# Altium PCB Slave_LHS.PcbDoc (part 3 of 3)
Units mil, origin at the board's own origin, x right, y up, seen from the top; angles counter-clockwise.
Board outline 6000 x 7620.08 mil, 4 copper layers (Top Layer, Int1 (GND), Int2 (PWR), Bottom Layer), stack 53.912 mil thick; 248 components, 191 nets, 688 pads, 143 vias.
Unrouted connection lines stored in the file: 218.
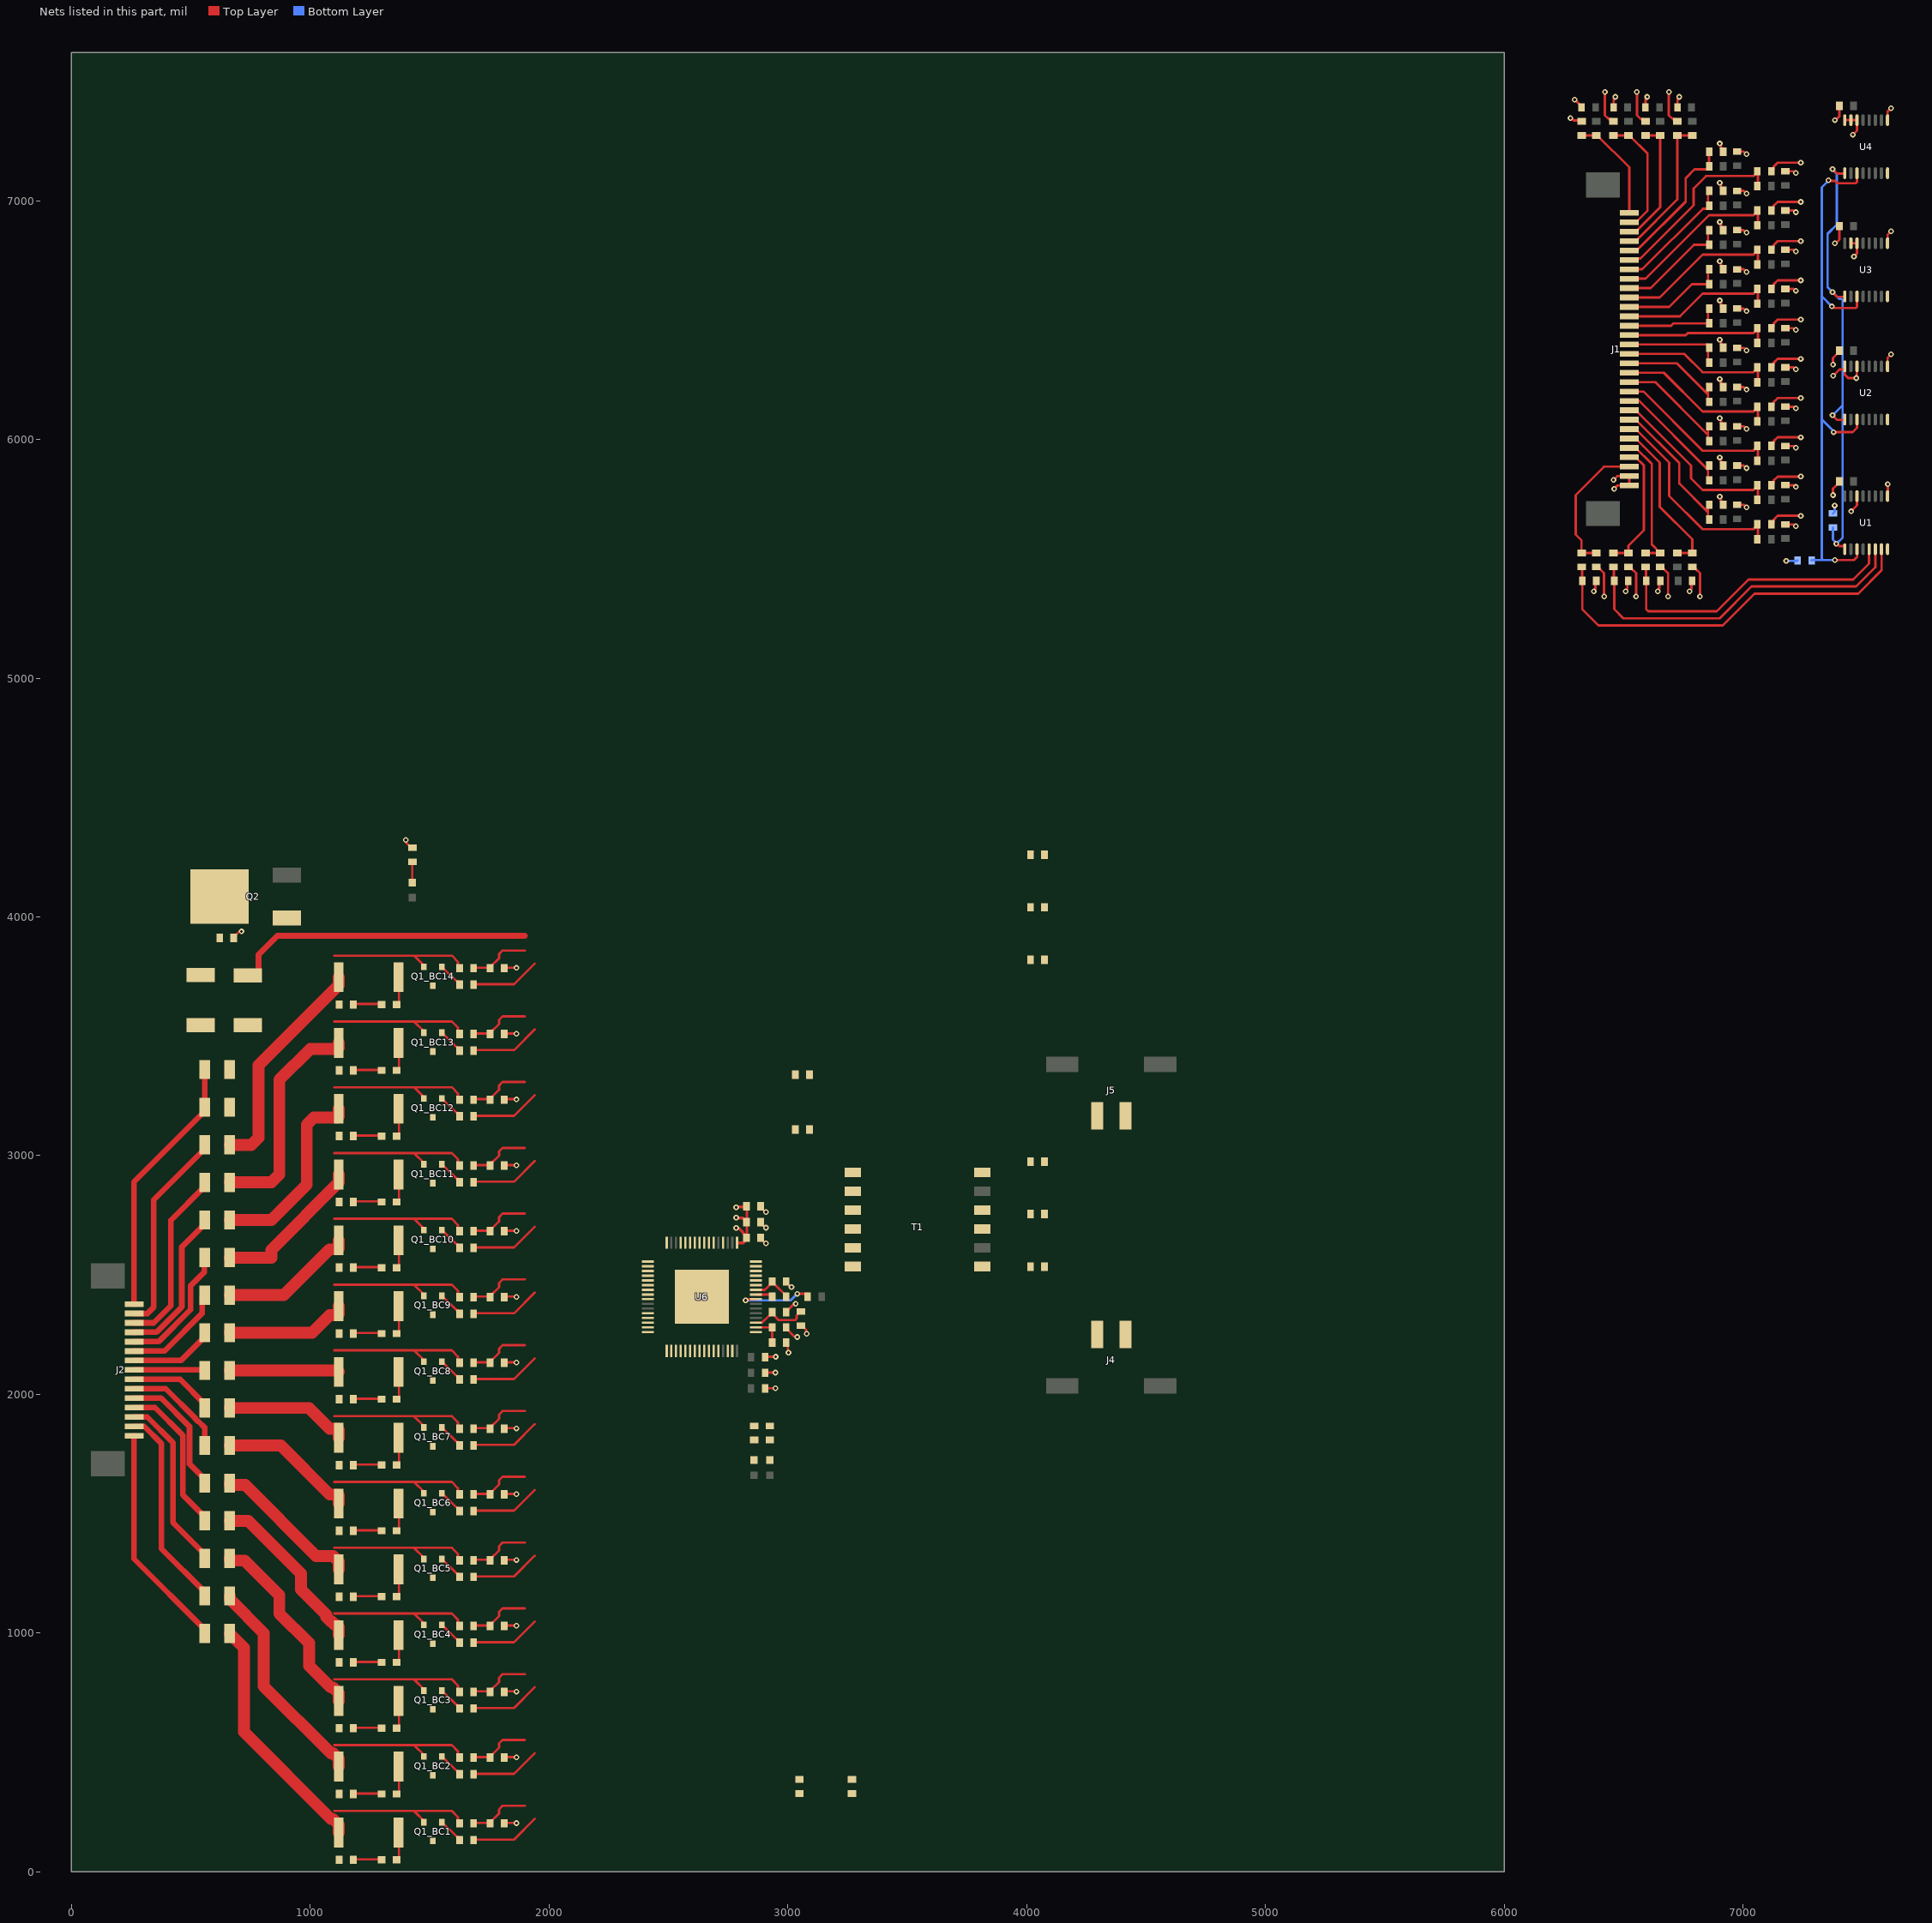
[diagram p2: the nets of this part, all layers, seen from the top]

## Via types
v1: diameter 23.62, hole 11.81, Top Layer to Bottom Layer, 143 vias

## Nets (pads, with @x,y where several pads share a name; then routed paths per layer and width w, separated by ;. In a path a pad name is that pad's centre, name@x,y a point inside that pad or via, vN(x,y) a via of type N, cw(c..) or ccw(c..) an arc to the next point about the centre after c; other vN are vias at no path point) (continued)
ADCIN26: C22_AFE26.2 R22_AFE26.2 U1.5 | length 1262.4
  Top Layer w10: C22_AFE26.2@6591.04,5407.48 C22_AFE26.2@6593.26,5405.26 ; C22_AFE26.2@6593.5,5407.48 R22_AFE26.2@6593.5,5465.55 ; C22_AFE26.2@6594.49,5407.48 6594.49,5289.37 6603.5,5280.35 6890.25,5280.35 7023.44,5413.54 7461.77,5413.54 7527.56,5479.33 7527.56,5518.98 7527.82,5519.24 U1.5@7527.82,5543.08
ADCIN27: C22_AFE27.2 R22_AFE27.2 U1.6 | length 1447.2
  Top Layer w10: C22_AFE27.2@6457.19,5407.48 C22_AFE27.2@6459.4,5405.26 ; C22_AFE27.2@6459.65,5407.48 R22_AFE27.2@6459.65,5465.55 ; C22_AFE27.2@6460.63,5407.48 6460.63,5289.37 6499.33,5250.67 6902.54,5250.67 7035.73,5383.86 7473.43,5383.86 7554.13,5464.57 U1.6@7554.13,5534.28
ADCIN28: C22_AFE28.2 R22_AFE28.2 U1.7 | length 1638.6
  Top Layer w10: C22_AFE28.2@6323.33,5407.48 C22_AFE28.2@6325.54,5405.26 ; C22_AFE28.2@6325.79,5407.48 R22_AFE28.2@6325.79,5465.55 ; C22_AFE28.2@6326.77,5407.48 6326.77,5289.37 6395.16,5220.98 6914.84,5220.98 7048.03,5354.17 7482.13,5354.17 7580.71,5452.76 7580.71,5518.98 7580.45,5519.24 7580.45,5533.31 U1.7@7580.71,5533.57
C0: C17.2 R16.2 U6.38
C1: C5_BC1.2 R3_BC1.2 U6.36 | length 255
  Top Layer w10: R3_BC1.2@1686.02,204.72 1754.92,204.72 1754.92,208.66 1790.35,244.09 1790.35,261.81 1805.12,276.57 1898.62,276.57
C2: C5_BC2.2 R3_BC2.2 U6.34 | length 255
  Top Layer w10: R3_BC2.2@1686.02,480.32 1754.92,480.32 1754.92,484.25 1790.35,519.69 1790.35,537.4 1805.12,552.17 1898.62,552.17
C3: C5_BC3.2 R3_BC3.2 U6.32 | length 255
  Top Layer w10: R3_BC3.2@1686.02,755.91 1754.92,755.91 1754.92,759.84 1790.35,795.28 1790.35,812.99 1805.12,827.76 1898.62,827.76
C4: C5_BC4.2 R3_BC4.2 U6.30 | length 255
  Top Layer w10: R3_BC4.2@1686.02,1031.5 1754.92,1031.5 1754.92,1035.43 1790.35,1070.87 1790.35,1088.58 1805.12,1103.35 1898.62,1103.35
C5: C5_BC5.2 R3_BC5.2 U6.28 | length 255
  Top Layer w10: R3_BC5.2@1686.02,1307.09 1754.92,1307.09 1754.92,1311.02 1790.35,1346.46 1790.35,1364.17 1805.12,1378.94 1898.62,1378.94
C6: C5_BC6.2 R3_BC6.2 U6.24 | length 255
  Top Layer w10: R3_BC6.2@1686.02,1582.68 1754.92,1582.68 1754.92,1586.61 1790.35,1622.05 1790.35,1639.76 1805.12,1654.53 1898.62,1654.53
C7: C5_BC7.2 R3_BC7.2 U6.22 | length 255
  Top Layer w10: R3_BC7.2@1686.02,1858.27 1754.92,1858.27 1754.92,1862.2 1790.35,1897.64 1790.35,1915.35 1805.12,1930.12 1898.62,1930.12
C8: C5_BC8.2 R3_BC8.2 U6.20 | length 255
  Top Layer w10: R3_BC8.2@1686.02,2133.86 1754.92,2133.86 1754.92,2137.8 1790.35,2173.23 1790.35,2190.95 1805.12,2205.71 1898.62,2205.71
C9: C5_BC9.2 R3_BC9.2 U6.18 | length 255
  Top Layer w10: R3_BC9.2@1686.02,2409.45 1754.92,2409.45 1754.92,2413.39 1790.35,2448.82 1790.35,2466.54 1805.12,2481.3 1898.62,2481.3
C10: C5_BC10.2 R3_BC10.2 U6.16 | length 255
  Top Layer w10: R3_BC10.2@1686.02,2685.04 1754.92,2685.04 1754.92,2688.98 1790.35,2724.41 1790.35,2742.13 1805.12,2756.89 1898.62,2756.89
C11: C5_BC11.2 R3_BC11.2 U6.12 | length 255
  Top Layer w10: R3_BC11.2@1686.02,2960.63 1754.92,2960.63 1754.92,2964.57 1790.35,3000 1790.35,3017.72 1805.12,3032.48 1898.62,3032.48
C12: C5_BC12.2 R3_BC12.2 U6.10 | length 255
  Top Layer w10: R3_BC12.2@1686.02,3236.22 1754.92,3236.22 1754.92,3240.16 1790.35,3275.59 1790.35,3293.31 1805.12,3308.07 1898.62,3308.07
C13: C5_BC13.2 R3_BC13.2 U6.8 | length 255
  Top Layer w10: R3_BC13.2@1686.02,3511.81 1754.92,3511.81 1754.92,3515.75 1790.35,3551.18 1790.35,3568.9 1805.12,3583.66 1898.62,3583.66
C14: C5_BC14.2 R3_BC14.2 U6.4 U6.6 | length 255
  Top Layer w10: R3_BC14.2@1686.02,3787.4 1754.92,3787.4 1754.92,3791.34 1790.35,3826.77 1790.35,3844.49 1805.12,3859.25 1898.62,3859.25
CB1: C1.1 C2.1 C3.1 C4.1 C5_BC1.1 C5_BC2.1 C5_BC3.1 C5_BC4.1 C5_BC5.1 C5_BC6.1 C5_BC7.1 C5_BC8.1 C5_BC9.1 C5_BC10.1 C5_BC11.1 C5_BC12.1 C5_BC13.1 C5_BC14.1 C6.1 C7.1 C8.1 C9.1 C10.1 C11.1 C12.1 C13.1 C14.1 C15.1 C16.1 C17.1 C18.1 C19.1 C20.2 C21.1 C22_AFE1.1 C22_AFE2.1 C22_AFE3.1 C22_AFE4.1 C22_AFE5.1 C22_AFE6.1 C22_AFE7.1 C22_AFE8.1 C22_AFE9.1 C22_AFE10.1 C22_AFE11.1 C22_AFE12.1 C22_AFE13.1 C22_AFE14.1 C22_AFE15.1 C22_AFE16.1 C22_AFE17.1 C22_AFE18.1 C22_AFE19.1 C22_AFE20.1 C22_AFE21.1 C22_AFE22.1 C22_AFE23.1 C22_AFE24.1 C22_AFE25.1 C22_AFE26.1 C22_AFE27.1 C22_AFE28.1 F3.2 J1.29 J1.30 R5_BC1.2 R6_BC1.1 R7.1 R12.1 R16.1 U1.9 U1.14 U2.9 U2.14 U2.16 U3.9 U3.14 U3.15 U4.9 U4.14 U4.15 U4.16 U6.59 U6.60 U6.65 | length 4675.5
  Top Layer w10: C16.1@679.13,3911.42 679.13,3915.35 702.76,3938.98 v1(711.61,3938.98) ; v1(1399.61,4321.85) 1399.61,4312.99 1423.23,4289.37 R12.1@1427.17,4289.37 ; C5_BC1.1@1813.98,204.72 1862.2,204.72 v1(1863.19,203.74) ; C5_BC2.1@1813.98,480.32 1862.2,480.32 v1(1863.19,479.33) ; C5_BC3.1@1813.98,755.91 1862.2,755.91 v1(1863.19,754.92) ; C5_BC4.1@1813.98,1031.5 1862.2,1031.5 v1(1863.19,1030.51) ; C5_BC5.1@1813.98,1307.09 1862.2,1307.09 v1(1863.19,1306.1) ; C5_BC6.1@1813.98,1582.68 1862.2,1582.68 v1(1863.19,1581.69) ; C5_BC7.1@1813.98,1858.27 1862.2,1858.27 v1(1863.19,1857.28) ; C5_BC8.1@1813.98,2133.86 1862.2,2133.86 v1(1863.19,2132.87) ; C5_BC9.1@1813.98,2409.45 1862.2,2409.45 v1(1863.19,2408.46) ; C5_BC10.1@1813.98,2685.04 1862.2,2685.04 v1(1863.19,2684.06) ; C5_BC11.1@1813.98,2960.63 1862.2,2960.63 v1(1863.19,2959.65) ; C5_BC12.1@1813.98,3236.22 1862.2,3236.22 v1(1863.19,3235.24) ; C5_BC13.1@1813.98,3511.81 1862.2,3511.81 v1(1863.19,3510.83) ; C5_BC14.1@1813.98,3787.4 1862.2,3787.4 v1(1863.19,3786.42) ; C8.1@2893.7,2644.69 2893.7,2643.78 2905.38,2632.1 v1(2907.82,2632.1) ; C6.1@2893.7,2710.59 2893.7,2709.69 2905.38,2698 v1(2907.82,2698) ; C7.1@2893.7,2776.5 2893.7,2775.59 2905.38,2763.91 v1(2907.82,2763.91) ; C13.1@2903.5,2023.74 2905.39,2025.63 v1(2947.87,2025.63) ; C14.1@2903.5,2089.19 2905.39,2091.08 v1(2947.87,2091.08) ; C15.1@2904.45,2155.59 2906.34,2157.48 v1(2948.82,2157.48) ; C11.1@2993.11,2279.53 2993.11,2275.59 3025.94,2242.76 3036.76,2242.76 v1(3039.37,2240.16) ; C9.1@2993.11,2346.46 3025.94,2379.28 v1(3032.83,2379.28) ; C12.1@2998.11,2210.71 3000.03,2208.79 3000.03,2177.14 v1(3002.63,2174.53) ; R7.1@3000.98,2461.54 3000.98,2460.63 3012.67,2448.95 v1(3015.1,2448.95) ; C10.1@3055.12,2287.4 3059.06,2287.4 3076.13,2270.32 3076.13,2256.42 v1(3078.74,2253.81) ; v1(6295.28,7423.23) 6323.82,7394.68 C22_AFE1.1@6323.82,7390.75 ; v1(6375,5363.19) 6375,5366.88 6382.14,5374.01 6382.14,5407.24 C22_AFE28.1@6382.38,5407.48 ; v1(6457.68,5830.71) 6473.43,5846.46 J1.29@6523.62,5846.46 J1.30@6523.62,5807.09 6474.41,5807.09 v1(6460.63,5793.31) ; C22_AFE2.1@6457.68,7390.75 6457.92,7390.99 6457.92,7424.22 6465.06,7431.35 v1(6465.06,7435.04) ; v1(6508.86,5363.19) 6508.86,5366.88 6516,5374.01 6516,5407.24 C22_AFE27.1@6516.24,5407.48 ; C22_AFE3.1@6591.54,7390.75 6591.78,7390.99 6591.78,7424.22 6598.92,7431.35 v1(6598.92,7435.04) ; v1(6642.72,5363.19) 6642.72,5366.88 6649.85,5374.01 6649.85,5407.24 C22_AFE26.1@6650.1,5407.48 ; C22_AFE4.1@6725.39,7390.75 6725.64,7390.99 6725.64,7424.22 6732.78,7431.35 v1(6732.78,7435.04) ; v1(6776.57,5363.19) 6776.57,5366.88 6783.71,5374.01 6783.71,5407.24 C22_AFE25.1@6783.96,5407.48 ; C22_AFE23.1@6975.39,5726.38 7002.61,5726.38 7013.44,5715.55 v1(7014.76,5715.55) ; C22_AFE21.1@6975.39,5890.75 7002.61,5890.75 7013.44,5879.92 v1(7014.76,5879.92) ; C22_AFE19.1@6975.39,6055.12 7002.61,6055.12 7013.44,6044.29 v1(7014.76,6044.29) ; C22_AFE17.1@6975.39,6219.49 7002.61,6219.49 7013.44,6208.66 v1(7014.76,6208.66) ; C22_AFE15.1@6975.39,6383.86 7002.61,6383.86 7013.44,6373.03 v1(7014.76,6373.03) ; C22_AFE13.1@6975.39,6548.23 7002.61,6548.23 7013.44,6537.4 v1(7014.76,6537.4) ; C22_AFE11.1@6975.39,6712.6 7002.61,6712.6 7013.44,6701.77 v1(7014.76,6701.77) ; C22_AFE9.1@6975.39,6876.97 7002.61,6876.97 7013.44,6866.14 v1(7014.76,6866.14) ; C22_AFE7.1@6975.39,7041.34 7002.61,7041.34 7013.44,7030.51 v1(7014.76,7030.51) ; C22_AFE5.1@6975.39,7205.71 7002.61,7205.71 7013.44,7194.88 v1(7014.76,7194.88) ; C22_AFE24.1@7177.17,5644.19 7177.41,5643.95 7210.63,5643.95 7217.77,5636.81 v1(7221.46,5636.81) ; C22_AFE22.1@7177.17,5808.56 7177.41,5808.32 7210.63,5808.32 7217.77,5801.18 v1(7221.46,5801.18) ; C22_AFE20.1@7177.17,5972.93 7177.41,5972.69 7210.63,5972.69 7217.77,5965.55 v1(7221.46,5965.55) ; C22_AFE18.1@7177.17,6137.3 7177.41,6137.06 7210.63,6137.06 7217.77,6129.92 v1(7221.46,6129.92) ; C22_AFE16.1@7177.17,6301.67 7177.41,6301.43 7210.63,6301.43 7217.77,6294.29 v1(7221.46,6294.29) ; C22_AFE14.1@7177.17,6466.04 7177.41,6465.8 7210.63,6465.8 7217.77,6458.66 v1(7221.46,6458.66) ; C22_AFE12.1@7177.17,6630.41 7177.41,6630.17 7210.63,6630.17 7217.77,6623.03 v1(7221.46,6623.03) ; C22_AFE10.1@7177.17,6794.78 7177.41,6794.54 7210.63,6794.54 7217.77,6787.4 v1(7221.46,6787.4) ; C22_AFE8.1@7177.17,6959.15 7177.41,6958.91 7210.63,6958.91 7217.77,6951.77 v1(7221.46,6951.77) ; C22_AFE6.1@7177.17,7123.52 7177.41,7123.28 7210.63,7123.28 7217.77,7116.14 v1(7221.46,7116.14) ; v1(7376.97,5766.73) 7376.97,5794.29 7403.54,5820.87 C1.1@7403.54,5824.8 ; v1(7376.97,6313.98) 7376.97,6341.54 7403.54,6368.11 C2.1@7403.54,6372.05 ; v1(7377.95,6266.73) 7404.11,6292.89 7424.44,6292.89 U2.16@7426.18,6294.64 ; v1@7392.72,6826.77 7403.54,6837.6 C3.1@7403.54,6893.7 ; v1@7392.72,7342.52 7403.54,7353.35 C4.1@7403.54,7397.64 ; U2.16@7426.18,6306.1 U2.16@7426.18,6294.64 ; U4.16@7426.18,7337.6 U4.15@7451.77,7337.6 U4.14@7477.36,7337.6 7477.36,7293.31 v1(7460.63,7276.57) ; U3.15@7451.05,6822.57 U3.15@7451.77,6821.85 U3.14@7477.36,6821.85 7477.36,6778.54 v1(7464.57,6765.75) ; v1(7452.76,5698.82) 7477.36,5723.43 U1.14@7477.36,5762.8 U1.14@7477.36,5773.23 ; U2.14@7477.36,6306.1 7476.64,6305.38 7476.64,6259.12 v1(7474.41,6256.89) 7440.28,6256.89 7426.18,6270.98 U2.16@7426.18,6294.64 ; U2.9@7605.32,6306.1 7605.32,6341.54 v1(7620.08,6356.3) ; U3.9@7605.32,6821.85 7605.32,6857.28 v1(7620.08,6872.05) ; U4.9@7605.32,7337.6 7605.32,7373.03 v1(7620.08,7387.8) ; U1.9@7606.3,5767.18 7606.04,5767.44 7606.04,5783.91 7606.3,5784.17 v1(7606.3,5812.99)
  Top Layer w50: F3.2@662.2,998.03 721.78,938.46 721.78,585.46 1086.31,220.92 1095.54,220.92 1119.09,197.36 R5_BC1.2@1119.09,164.68
  other v1: 7384.84,6821.85 7384.84,7337.6
CB2: F1_BC1.2 Q1_BC1.2 R3_BC1.1 R5_BC2.2 R6_BC2.1 | length 1529.7
  Top Layer w10: 1100.39,254.92 1434.06,254.92 ; Q1_BC1.2@1477.36,209.65 1477.36,211.61 1434.06,254.92 ; R3_BC1.1@1626.97,204.72 1618.49,213.2 1618.49,228.95 1592.52,254.92 1434.06,254.92
  Top Layer w50: F1_BC1.2@662.2,1155.51 662.2,1143.11 805.31,1000 805.31,777.51 1086.31,496.51 1095.54,496.51 1119.09,472.95 R5_BC2.2@1119.09,440.28
CB3: F1_BC2.2 Q1_BC2.2 R3_BC2.1 R5_BC3.2 R6_BC3.1 | length 1446.8
  Top Layer w10: 1100.39,530.51 1434.06,530.51 ; Q1_BC2.2@1477.36,485.24 1477.36,487.2 1434.06,530.51 ; R3_BC2.1@1626.97,480.32 1618.49,488.8 1618.49,504.54 1592.52,530.51 1434.06,530.51
  Top Layer w50: F1_BC2.2@662.2,1312.99 662.2,1306.18 664.76,1303.62 724.92,1303.62 870.08,1158.46 870.08,1082.68 995.08,957.68 995.08,863.33 1086.31,772.1 1095.54,772.1 1119.09,748.54 R5_BC3.2@1119.09,715.87
CB4: F1_BC3.2 Q1_BC3.2 R3_BC3.1 R5_BC4.2 R6_BC4.1 | length 1339.1
  Top Layer w10: 1100.39,806.1 1434.06,806.1 ; Q1_BC3.2@1477.36,760.83 1477.36,762.8 1434.06,806.1 ; R3_BC3.1@1626.97,755.91 1618.49,764.39 1618.49,780.13 1592.52,806.1 1434.06,806.1
  Top Layer w50: F1_BC3.2@662.2,1470.47 740.16,1470.47 961.46,1249.17 961.46,1181.77 1066.39,1076.83 1066.39,1067.61 1086.31,1047.69 1089.81,1047.69 1103.52,1033.98 1109.25,1033.98 1119.09,1024.13 R5_BC4.2@1119.09,991.46
CB5: F1_BC4.2 Q1_BC4.2 R3_BC4.1 R5_BC5.2 R6_BC5.1 | length 1248.2
  Top Layer w10: 1100.39,1081.69 1434.06,1081.69 ; Q1_BC4.2@1477.36,1036.42 1477.36,1038.39 1434.06,1081.69 ; R3_BC4.1@1626.97,1031.5 1618.49,1039.98 1618.49,1055.73 1592.52,1081.69 1434.06,1081.69
  Top Layer w50: F1_BC4.2@662.2,1627.95 662.2,1623.11 664.76,1620.55 726.89,1620.55 1024.16,1323.28 1095.54,1323.28 1119.09,1299.72 R5_BC5.2@1119.09,1267.05
CB6: F1_BC5.2 Q1_BC5.2 R3_BC5.1 R5_BC6.2 R6_BC6.1 | length 1196.4
  Top Layer w10: 1100.39,1357.28 1434.06,1357.28 ; Q1_BC5.2@1477.36,1312.01 1477.36,1313.98 1434.06,1357.28 ; R3_BC5.1@1626.97,1307.09 1618.49,1315.57 1618.49,1331.32 1592.52,1357.28 1434.06,1357.28
  Top Layer w50: F1_BC5.2@662.2,1785.43 876.3,1785.43 1081.5,1580.24 1114.17,1580.24 1119.09,1575.32 R5_BC6.2@1119.09,1542.64
CB7: F1_BC6.2 Q1_BC6.2 R3_BC6.1 R5_BC7.2 R6_BC7.1 | length 1147.5
  Top Layer w10: 1100.39,1632.87 1434.06,1632.87 ; Q1_BC6.2@1477.36,1587.6 1477.36,1589.57 1434.06,1632.87 ; R3_BC6.1@1626.97,1582.68 1618.49,1591.16 1618.49,1606.91 1592.52,1632.87 1434.06,1632.87
  Top Layer w50: F1_BC6.2@662.2,1942.91 994.41,1942.91 1081.5,1855.83 1114.17,1855.83 1119.09,1850.91 R5_BC7.2@1119.09,1818.23
CB8: F1_BC7.2 Q1_BC7.2 R3_BC7.1 R5_BC8.2 R6_BC8.1 | length 1080.4
  Top Layer w10: 1100.39,1908.46 1434.06,1908.46 ; Q1_BC7.2@1477.36,1863.19 1477.36,1865.16 1434.06,1908.46 ; R3_BC7.1@1626.97,1858.27 1618.49,1866.75 1618.49,1882.5 1592.52,1908.46 1434.06,1908.46
  Top Layer w50: F1_BC7.2@662.2,2100.39 1114.17,2100.39 1119.09,2095.47 R5_BC8.2@1119.09,2093.82
CB9: F1_BC8.2 Q1_BC8.2 R3_BC8.1 R5_BC9.2 R6_BC9.1 | length 1142
  Top Layer w10: 1100.39,2184.06 1434.06,2184.06 ; Q1_BC8.2@1477.36,2138.78 1477.36,2140.75 1434.06,2184.06 ; R3_BC8.1@1626.97,2133.86 1618.49,2142.34 1618.49,2158.09 1592.52,2184.06 1434.06,2184.06
  Top Layer w50: F1_BC8.2@662.2,2257.87 1007.56,2257.87 1081.5,2331.81 1114.17,2331.81 1119.09,2336.73 R5_BC9.2@1119.09,2369.41
CB10: F1_BC9.2 Q1_BC9.2 R3_BC9.1 R5_BC10.2 R6_BC10.1 | length 1191
  Top Layer w10: 1100.39,2459.65 1434.06,2459.65 ; Q1_BC9.2@1477.36,2414.37 1477.36,2416.34 1434.06,2459.65 ; R3_BC9.1@1626.97,2409.45 1618.49,2417.93 1618.49,2433.68 1592.52,2459.65 1434.06,2459.65
  Top Layer w50: F1_BC9.2@662.2,2415.35 889.45,2415.35 1081.5,2607.4 1114.17,2607.4 1119.09,2612.32 R5_BC10.2@1119.09,2645
CB11: F1_BC10.2 Q1_BC10.2 R3_BC10.1 R5_BC11.2 R6_BC11.1 | length 1259
  Top Layer w10: 1100.39,2735.24 1434.06,2735.24 ; Q1_BC10.2@1477.36,2689.96 1477.36,2691.93 1434.06,2735.24 ; R3_BC10.1@1626.97,2685.04 1618.49,2693.52 1618.49,2709.27 1592.52,2735.24 1434.06,2735.24
  Top Layer w50: F1_BC10.2@662.2,2572.83 836.61,2572.83 836.61,2605.43 1119.09,2887.91 R5_BC11.2@1119.09,2920.59
CB12: F1_BC11.2 Q1_BC11.2 R3_BC11.1 R5_BC12.2 R6_BC12.1 | length 1435.5
  Top Layer w10: 1100.39,3010.83 1434.06,3010.83 ; Q1_BC11.2@1477.36,2965.55 1477.36,2967.52 1434.06,3010.83 ; R3_BC11.1@1626.97,2960.63 1618.49,2969.11 1618.49,2984.86 1592.52,3010.83 1434.06,3010.83
  Top Layer w50: F1_BC11.2@662.2,2730.31 836.61,2730.31 985.24,2878.94 985.24,3129.92 1014.53,3159.21 1114.17,3159.21 1119.09,3164.13 R5_BC12.2@1119.09,3196.18
CB13: F1_BC12.2 Q1_BC12.2 R3_BC12.1 R5_BC13.2 R6_BC13.1 | length 1562.1
  Top Layer w10: 1100.39,3286.42 1434.06,3286.42 ; Q1_BC12.2@1477.36,3241.14 1477.36,3243.11 1434.06,3286.42 ; R3_BC12.1@1626.97,3236.22 1618.49,3244.7 1618.49,3260.45 1592.52,3286.42 1434.06,3286.42
  Top Layer w50: F1_BC12.2@662.2,2887.8 836.61,2887.8 870.08,2921.26 870.08,3316.93 1000,3446.85 1114.17,3446.85 1119.09,3451.77 R5_BC13.2@1119.09,3471.77
CB14: F1_BC13.2 Q1_BC13.2 R3_BC13.1 R5_BC14.2 R6_BC14.1 | length 1564.7
  Top Layer w10: 1100.39,3562.01 1434.06,3562.01 ; Q1_BC13.2@1477.36,3516.73 1477.36,3518.7 1434.06,3562.01 ; R3_BC13.1@1626.97,3511.81 1618.49,3520.29 1618.49,3536.04 1592.52,3562.01 1434.06,3562.01
  Top Layer w50: F1_BC13.2@662.2,3045.28 753.19,3045.28 782.48,3074.57 782.48,3378.59 1091.49,3687.59 1092,3687.59 1119.09,3714.68 R5_BC14.2@1119.09,3747.36
COMMS_LED: R13.1 U6.47
Drive: Q2.1 U6.49
FPC1: J1.1 R21_AFE1.1 R22_AFE1.1 | length 446.2
  Top Layer w10: R21_AFE1.1@6323.82,7273.62 R22_AFE1.1@6385.83,7273.62 6389.76,7273.62 6523.62,7139.76 J1.1@6523.62,6948.82
FPC2: J1.2 R21_AFE2.1 R22_AFE2.1 | length 509.7
  Top Layer w10: R21_AFE2.1@6457.68,7273.62 R22_AFE2.1@6519.69,7273.62 6523.62,7273.62 6600.39,7196.85 6600.39,6958.86 6550.98,6909.45 J1.2@6523.62,6909.45
FPC3: J1.3 R21_AFE3.1 R22_AFE3.1 | length 535.4
  Top Layer w10: J1.3@6523.62,6870.08 6550.98,6870.08 6653.54,6972.64 R22_AFE3.1@6653.54,7273.62 R21_AFE3.1@6591.54,7273.62
FPC4: J1.4 R21_AFE4.1 R22_AFE4.1 | length 604.5
  Top Layer w10: J1.4@6523.62,6830.71 6550.98,6830.71 6725.39,7005.12 R21_AFE4.1@6725.39,7273.62 R22_AFE4.1@6787.4,7273.62
FPC5: J1.5 R21_AFE5.1 R22_AFE5.1 | length 602
  Top Layer w10: J1.5@6523.62,6791.34 6530.63,6798.35 6562.13,6798.35 6759.84,6996.06 6759.84,7093.5 6797.32,7130.98 6849.49,7130.98 6858.27,7139.76 R22_AFE5.1@6858.27,7143.7 R21_AFE5.1@6858.27,7205.71
FPC6: J1.6 R21_AFE6.1 R22_AFE6.1 | length 798
  Top Layer w10: J1.6@6523.62,6751.97 6529.74,6758.09 6570.09,6758.09 6793.31,6981.3 6793.31,7051.18 6845.47,7103.35 7043.8,7103.35 7060.04,7119.59 R21_AFE6.1@7060.04,7123.52 7062.98,7120.59 7062.98,7064.45 R22_AFE6.1@7060.04,7061.52
FPC7: J1.7 R21_AFE7.1 R22_AFE7.1 | length 509.4
  Top Layer w10: J1.7@6523.62,6712.6 6577.99,6712.6 6832.01,6966.61 6849.49,6966.61 6858.27,6975.39 R22_AFE7.1@6858.27,6979.33 ; R22_AFE7.1@6853.35,6979.33 R21_AFE7.1@6853.35,7041.34
FPC8: J1.8 R21_AFE8.1 R22_AFE8.1 | length 721.6
  Top Layer w10: J1.8@6523.62,6673.23 6592.52,6673.23 6858.27,6938.98 7043.8,6938.98 7060.04,6955.22 R21_AFE8.1@7060.04,6959.15 7062.98,6956.22 7062.98,6900.08 R22_AFE8.1@7060.04,6897.15
FPC9: J1.9 R21_AFE9.1 R22_AFE9.1 | length 471.7
  Top Layer w10: J1.9@6523.62,6633.86 6613.19,6633.86 6794.29,6814.96 R22_AFE9.1@6858.27,6814.96 ; R22_AFE9.1@6853.35,6814.96 R21_AFE9.1@6853.35,6876.97
FPC10: J1.10 R21_AFE10.1 R22_AFE10.1 | length 686.1
  Top Layer w10: J1.10@6523.62,6594.49 6650.59,6594.49 6830.71,6774.61 7043.8,6774.61 7060.04,6790.85 R21_AFE10.1@7060.04,6794.78 7062.98,6791.85 7062.98,6735.71 R22_AFE10.1@7060.04,6732.78
FPC11: J1.11 R21_AFE11.1 R22_AFE11.1 | length 436.2
  Top Layer w10: J1.11@6523.62,6555.12 6690.94,6555.12 6786.42,6650.59 R22_AFE11.1@6858.27,6650.59 ; R22_AFE11.1@6853.35,6650.59 R21_AFE11.1@6853.35,6712.6
FPC12: J1.12 R21_AFE12.1 R22_AFE12.1 | length 650.7
  Top Layer w10: J1.12@6523.62,6515.75 6736.22,6515.75 6830.71,6610.24 7043.8,6610.24 7060.04,6626.48 R21_AFE12.1@7060.04,6630.41 7062.98,6627.48 7062.98,6571.34 R22_AFE12.1@7060.04,6568.41
FPC13: J1.13 R21_AFE13.1 R22_AFE13.1 | length 400.7
  Top Layer w10: J1.13@6523.62,6476.38 6698.82,6476.38 6708.66,6486.22 R22_AFE13.1@6853.35,6486.22 ; R21_AFE13.1@6853.35,6548.23 R22_AFE13.1@6853.35,6486.22 ; R22_AFE13.1@6858.27,6486.22 R22_AFE13.1@6853.35,6486.22
FPC14: J1.14 R21_AFE14.1 R22_AFE14.1 | length 615.2
  Top Layer w10: J1.14@6523.62,6437.01 6759.84,6437.01 6768.7,6445.87 7043.8,6445.87 7060.04,6462.11 R21_AFE14.1@7060.04,6466.04 7062.98,6463.11 7062.98,6406.97 R22_AFE14.1@7060.04,6404.04
FPC15: J1.15 R21_AFE15.1 R22_AFE15.1 | length 404.7
  Top Layer w10: J1.15@6523.62,6397.64 6843.63,6397.64 6844.69,6396.57 6849.49,6396.57 6858.27,6387.8 R21_AFE15.1@6858.27,6383.86 ; R22_AFE15.1@6853.35,6321.85 R21_AFE15.1@6853.35,6383.86
FPC16: J1.16 R21_AFE16.1 R22_AFE16.1 | length 643.3
  Top Layer w10: J1.16@6523.62,6358.27 6753.94,6358.27 6830.71,6281.5 7043.8,6281.5 7060.04,6297.74 R21_AFE16.1@7060.04,6301.67 7062.98,6298.74 7062.98,6242.6 R22_AFE16.1@7060.04,6239.67
FPC17: J1.17 R21_AFE17.1 R22_AFE17.1 | length 462.1
  Top Layer w10: J1.17@6523.62,6318.9 6722.93,6318.9 6853.35,6188.48 ; R21_AFE17.1@6849.49,6232.2 6858.27,6223.43 R21_AFE17.1@6858.27,6219.49 ; R22_AFE17.1@6853.35,6157.48 6853.35,6188.48 ; R21_AFE17.1@6853.35,6219.49 6853.35,6188.48
FPC18: J1.18 R21_AFE18.1 R22_AFE18.1 | length 678.8
  Top Layer w10: J1.18@6523.62,6279.53 6668.31,6279.53 6830.71,6117.13 7043.8,6117.13 7060.04,6133.37 R21_AFE18.1@7060.04,6137.3 7062.98,6134.36 7062.98,6078.23 R22_AFE18.1@7060.04,6075.3
FPC19: J1.19 R21_AFE19.1 R22_AFE19.1 | length 480.4
  Top Layer w10: J1.19@6523.62,6240.16 6632.38,6240.16 6848.43,6024.11 ; R22_AFE19.1@6858.27,5993.11 6853.35,5998.03 6853.35,6050.2 R21_AFE19.1@6858.27,6055.12
FPC20: J1.20 R21_AFE20.1 R22_AFE20.1 | length 714.3
  Top Layer w10: J1.20@6523.62,6200.79 6582.68,6200.79 6830.71,5952.76 7043.8,5952.76 7060.04,5969 R21_AFE20.1@7060.04,5972.93 7062.98,5969.99 7062.98,5913.86 R22_AFE20.1@7060.04,5910.93
FPC21: J1.21 R21_AFE21.1 R22_AFE21.1 | length 527.5
  Top Layer w10: J1.21@6523.62,6161.42 6564.96,6161.42 R21_AFE21.1@6853.35,5873.03 ; R21_AFE21.1@6849.49,5903.46 6858.27,5894.68 R21_AFE21.1@6858.27,5890.75 ; R22_AFE21.1@6853.35,5828.74 R21_AFE21.1@6853.35,5873.03 ; R21_AFE21.1@6853.35,5890.75 R21_AFE21.1@6853.35,5873.03
FPC22: J1.22 R21_AFE22.1 R22_AFE22.1 | length 781.3
  Top Layer w10: J1.22@6523.62,6122.05 6550.98,6122.05 6782.48,5890.55 6782.48,5836.61 6830.71,5788.39 7043.8,5788.39 7060.04,5804.63 R21_AFE22.1@7060.04,5808.56 7062.98,5805.62 7062.98,5749.49 R22_AFE22.1@7060.04,5746.56
FPC23: J1.23 R21_AFE23.1 R22_AFE23.1 | length 601.9
  Top Layer w10: J1.23@6523.62,6082.68 6550.98,6082.68 6733.27,5900.39 6733.27,5815.45 6853.35,5695.37 ; R22_AFE23.1@6853.35,5664.37 6853.35,5695.37 ; R21_AFE23.1@6853.35,5726.38 6853.35,5695.37
FPC24: J1.24 R21_AFE24.1 R22_AFE24.1 | length 867
  Top Layer w10: J1.24@6523.62,6043.31 6550.98,6043.31 6690.94,5903.35 6690.94,5763.78 6830.71,5624.02 7043.8,5624.02 7060.04,5640.26 R21_AFE24.1@7060.04,5644.19 7062.98,5641.25 7062.98,5585.12 R22_AFE24.1@7060.04,5582.18
FPC25: J1.25 R21_AFE25.1 R22_AFE25.1 | length 666.6
  Top Layer w10: J1.25@6523.62,6003.94 6550.98,6003.94 6651.57,5903.35 6651.57,5717.52 6787.4,5581.69 R21_AFE25.1@6787.4,5524.61 R22_AFE25.1@6725.39,5524.61
FPC26: J1.26 R21_AFE26.1 R22_AFE26.1 | length 571.8
  Top Layer w10: J1.26@6523.62,5964.57 6550.98,5964.57 6618.11,5897.44 6618.11,5560.04 R21_AFE26.1@6653.54,5524.61 R22_AFE26.1@6591.54,5524.61
FPC27: J1.27 R21_AFE27.1 R22_AFE27.1 | length 530.8
  Top Layer w10: R22_AFE27.1@6457.68,5524.61 R21_AFE27.1@6519.69,5524.61 6519.69,5555.12 6584.65,5620.08 6584.65,5891.54 6550.98,5925.2 J1.27@6523.62,5925.2
FPC28: J1.28 R21_AFE28.1 R22_AFE28.1 | length 588.1
  Top Layer w10: R21_AFE28.1@6385.83,5524.61 R22_AFE28.1@6323.82,5524.61 6323.82,5576.77 6299.21,5601.38 6299.21,5766.73 6418.31,5885.83 J1.28@6523.62,5885.83
HC2_BC1: D1_BC1.2 Q1_BC1.3 R5_BC1.1 | length 117.6
  Top Layer w10: D1_BC1.2@1363.65,52.17 1371.06,59.58 R5_BC1.1@1371.06,166.67
HC2_BC2: D1_BC2.2 Q1_BC2.3 R5_BC2.1 | length 117.6
  Top Layer w10: D1_BC2.2@1363.65,327.76 1371.06,335.17 R5_BC2.1@1371.06,442.26
HC2_BC3: D1_BC3.2 Q1_BC3.3 R5_BC3.1 | length 117.6
  Top Layer w10: D1_BC3.2@1363.65,603.35 1371.06,610.76 R5_BC3.1@1371.06,717.85
HC2_BC4: D1_BC4.2 Q1_BC4.3 R5_BC4.1 | length 117.6
  Top Layer w10: D1_BC4.2@1363.65,878.94 1371.06,886.35 R5_BC4.1@1371.06,993.44
HC2_BC5: D1_BC5.2 Q1_BC5.3 R5_BC5.1 | length 117.6
  Top Layer w10: D1_BC5.2@1363.65,1154.53 1371.06,1161.95 R5_BC5.1@1371.06,1269.03
HC2_BC6: D1_BC6.2 Q1_BC6.3 R5_BC6.1 | length 117.6
  Top Layer w10: D1_BC6.2@1363.65,1430.12 1371.06,1437.54 R5_BC6.1@1371.06,1544.62
HC2_BC7: D1_BC7.2 Q1_BC7.3 R5_BC7.1 | length 117.6
  Top Layer w10: D1_BC7.2@1363.65,1705.71 1371.06,1713.13 R5_BC7.1@1371.06,1820.21
HC2_BC8: D1_BC8.2 Q1_BC8.3 R5_BC8.1 | length 117.6
  Top Layer w10: D1_BC8.2@1363.65,1981.3 1371.06,1988.72 R5_BC8.1@1371.06,2095.8
HC2_BC9: D1_BC9.2 Q1_BC9.3 R5_BC9.1 | length 117.6
  Top Layer w10: D1_BC9.2@1363.65,2256.89 1371.06,2264.31 R5_BC9.1@1371.06,2371.39
HC2_BC10: D1_BC10.2 Q1_BC10.3 R5_BC10.1 | length 117.6
  Top Layer w10: D1_BC10.2@1363.65,2532.48 1371.06,2539.9 R5_BC10.1@1371.06,2646.98
HC2_BC11: D1_BC11.2 Q1_BC11.3 R5_BC11.1 | length 117.6
  Top Layer w10: D1_BC11.2@1363.65,2808.07 1371.06,2815.49 R5_BC11.1@1371.06,2922.57
HC2_BC12: D1_BC12.2 Q1_BC12.3 R5_BC12.1 | length 117.6
  Top Layer w10: D1_BC12.2@1363.65,3083.66 1371.06,3091.08 R5_BC12.1@1371.06,3198.17
HC2_BC13: D1_BC13.2 Q1_BC13.3 R5_BC13.1 | length 117.6
  Top Layer w10: D1_BC13.2@1363.65,3359.25 1371.06,3366.67 R5_BC13.1@1371.06,3473.76
HC2_BC14: D1_BC14.2 Q1_BC14.3 R5_BC14.1 | length 117.6
  Top Layer w10: D1_BC14.2@1363.65,3634.84 1371.06,3642.26 R5_BC14.1@1371.06,3749.35
IA_N: R20.1 T1.7 U6.61
IA_P: R19.2 T1.9 U6.62
IB_N: R18.1 T1.10 U6.63
IB_P: R17.2 T1.12 U6.64
IBAIS: R8.2 U6.57 | length 72.6
  Top Layer w10: U6.57@2866.14,2418.31 2925.28,2418.31 2934.06,2409.53 R8.2@2934.06,2408.46
ICMP: R7.2 R8.1 U6.58 | length 166.8
  Top Layer w10: U6.58@2866.14,2437.99 2903.54,2437.99 2934.06,2468.5 2942.83,2459.72 2945.79,2459.72 2993.11,2412.4 R8.1@2993.11,2408.46
NetC6_2: C6.2 C7.2 C8.2 R9.2 U6.1 | length 1610.6
  Top Layer w12: v1(2783.46,2696.85) 2785.69,2694.63 2794.55,2694.63 C8.2@2828.21,2660.96 ; v1(2783.46,2740.16) 2785.69,2737.93 2811.77,2737.93 2816.49,2733.21 2821.87,2733.21 C6.2@2828.21,2726.87 ; v1(2783.46,2783.46) 2785.43,2785.43 2824.8,2785.43 C7.2@2826.77,2787.4 2828.21,2785.96 C6.2@2828.21,2726.87 ; U6.1@2787.4,2634.84 2812.83,2634.84 2829.65,2651.65 2829.65,2655.59 2829.65,2659.53 C8.2@2828.21,2660.96 ; C8.2@2828.21,2660.96 C6.2@2828.21,2726.87
  Top Layer w25: R9.2@738.19,3754.92 766.44,3754.92 783.46,3771.95 783.46,3842.52 862.2,3921.26 1897.64,3921.26
NetC16_2: C16.2 Q2.2 R10.1
NetC18_2: C18.2 R17.1 R18.2
NetC19_2: C19.2 R19.1 R20.2
NetC20_1: C20.1 T1.11
NetC21_2: C21.2 T1.8
NetD1_BC1_1: D1_BC1.1 R6_BC1.2 | length 119
  Top Layer w10: R6_BC1.2@1181.64,52.17 D1_BC1.1@1300.65,52.17
NetD1_BC2_1: D1_BC2.1 R6_BC2.2 | length 119
  Top Layer w10: R6_BC2.2@1181.64,327.76 D1_BC2.1@1300.65,327.76
NetD1_BC3_1: D1_BC3.1 R6_BC3.2 | length 119
  Top Layer w10: R6_BC3.2@1181.64,603.35 D1_BC3.1@1300.65,603.35
NetD1_BC4_1: D1_BC4.1 R6_BC4.2 | length 119
  Top Layer w10: R6_BC4.2@1181.64,878.94 D1_BC4.1@1300.65,878.94
NetD1_BC5_1: D1_BC5.1 R6_BC5.2 | length 119
  Top Layer w10: R6_BC5.2@1181.64,1154.53 D1_BC5.1@1300.65,1154.53
NetD1_BC6_1: D1_BC6.1 R6_BC6.2 | length 119
  Top Layer w10: R6_BC6.2@1181.64,1430.12 D1_BC6.1@1300.65,1430.12
NetD1_BC7_1: D1_BC7.1 R6_BC7.2 | length 119
  Top Layer w10: R6_BC7.2@1181.64,1705.71 D1_BC7.1@1300.65,1705.71
NetD1_BC8_1: D1_BC8.1 R6_BC8.2 | length 119
  Top Layer w10: R6_BC8.2@1181.64,1981.3 D1_BC8.1@1300.65,1981.3
NetD1_BC9_1: D1_BC9.1 R6_BC9.2 | length 119
  Top Layer w10: R6_BC9.2@1181.64,2256.89 D1_BC9.1@1300.65,2256.89
NetD1_BC10_1: D1_BC10.1 R6_BC10.2 | length 119
  Top Layer w10: R6_BC10.2@1181.64,2532.48 D1_BC10.1@1300.65,2532.48
NetD1_BC11_1: D1_BC11.1 R6_BC11.2 | length 119
  Top Layer w10: R6_BC11.2@1181.64,2808.07 D1_BC11.1@1300.65,2808.07
NetD1_BC12_1: D1_BC12.1 R6_BC12.2 | length 119
  Top Layer w10: R6_BC12.2@1181.64,3083.66 D1_BC12.1@1300.65,3083.66
NetD1_BC13_1: D1_BC13.1 R6_BC13.2 | length 119
  Top Layer w10: R6_BC13.2@1181.64,3359.25 D1_BC13.1@1300.65,3359.25
NetD1_BC14_1: D1_BC14.1 R6_BC14.2 | length 119
  Top Layer w10: R6_BC14.2@1181.64,3634.84 D1_BC14.1@1300.65,3634.84
NetD2_1: D2.1 R12.2 | length 86.6
  Top Layer w10: D2.1@1427.17,4143.7 R12.2@1427.17,4230.32
NetD3_1: D3.1 R13.2
NetD4_1: D4.1 R14.2
NetQ1_BC1_1: Q1_BC1.1 R4_BC1.1 | length 109.2
  Top Layer w10: Q1_BC1.1@1552.17,209.65 1552.17,207.68 1612.28,147.56 1618.19,147.56 1626.97,138.78 R4_BC1.1@1626.97,134.84
NetQ1_BC2_1: Q1_BC2.1 R4_BC2.1 | length 109.2
  Top Layer w10: Q1_BC2.1@1552.17,485.24 1552.17,483.27 1612.28,423.15 1618.19,423.15 1626.97,414.37 R4_BC2.1@1626.97,410.43
NetQ1_BC3_1: Q1_BC3.1 R4_BC3.1 | length 109.2
  Top Layer w10: Q1_BC3.1@1552.17,760.83 1552.17,758.86 1612.28,698.74 1618.19,698.74 1626.97,689.96 R4_BC3.1@1626.97,686.02
NetQ1_BC4_1: Q1_BC4.1 R4_BC4.1 | length 109.2
  Top Layer w10: Q1_BC4.1@1552.17,1036.42 1552.17,1034.45 1612.28,974.33 1618.19,974.33 1626.97,965.55 R4_BC4.1@1626.97,961.61
NetQ1_BC5_1: Q1_BC5.1 R4_BC5.1 | length 109.2
  Top Layer w10: Q1_BC5.1@1552.17,1312.01 1552.17,1310.04 1612.28,1249.92 1618.19,1249.92 1626.97,1241.14 R4_BC5.1@1626.97,1237.2
NetQ1_BC6_1: Q1_BC6.1 R4_BC6.1 | length 109.2
  Top Layer w10: Q1_BC6.1@1552.17,1587.6 1552.17,1585.63 1612.28,1525.51 1618.19,1525.51 1626.97,1516.73 R4_BC6.1@1626.97,1512.8
NetQ1_BC7_1: Q1_BC7.1 R4_BC7.1 | length 109.2
  Top Layer w10: Q1_BC7.1@1552.17,1863.19 1552.17,1861.22 1612.28,1801.1 1618.19,1801.1 1626.97,1792.32 R4_BC7.1@1626.97,1788.39
NetQ1_BC8_1: Q1_BC8.1 R4_BC8.1 | length 109.2
  Top Layer w10: Q1_BC8.1@1552.17,2138.78 1552.17,2136.81 1612.28,2076.69 1618.19,2076.69 1626.97,2067.91 R4_BC8.1@1626.97,2063.98
NetQ1_BC9_1: Q1_BC9.1 R4_BC9.1 | length 109.2
  Top Layer w10: Q1_BC9.1@1552.17,2414.37 1552.17,2412.4 1612.28,2352.28 1618.19,2352.28 1626.97,2343.5 R4_BC9.1@1626.97,2339.57
NetQ1_BC10_1: Q1_BC10.1 R4_BC10.1 | length 109.2
  Top Layer w10: Q1_BC10.1@1552.17,2689.96 1552.17,2687.99 1612.28,2627.87 1618.19,2627.87 1626.97,2619.09 R4_BC10.1@1626.97,2615.16
NetQ1_BC11_1: Q1_BC11.1 R4_BC11.1 | length 109.2
  Top Layer w10: Q1_BC11.1@1552.17,2965.55 1552.17,2963.58 1612.28,2903.46 1618.19,2903.46 1626.97,2894.69 R4_BC11.1@1626.97,2890.75
NetQ1_BC12_1: Q1_BC12.1 R4_BC12.1 | length 109.2
  Top Layer w10: Q1_BC12.1@1552.17,3241.14 1552.17,3239.17 1612.28,3179.06 1618.19,3179.06 1626.97,3170.28 R4_BC12.1@1626.97,3166.34
NetQ1_BC13_1: Q1_BC13.1 R4_BC13.1 | length 109.2
  Top Layer w10: Q1_BC13.1@1552.17,3516.73 1552.17,3514.76 1612.28,3454.65 1618.19,3454.65 1626.97,3445.87 R4_BC13.1@1626.97,3441.93
NetQ1_BC14_1: Q1_BC14.1 R4_BC14.1 | length 109.2
  Top Layer w10: Q1_BC14.1@1552.17,3792.32 1552.17,3790.35 1612.28,3730.24 1618.19,3730.24 1626.97,3721.46 R4_BC14.1@1626.97,3717.52
NetU1_8: U1.8 U6.44
NetU2_8: U2.8 U6.41
NetU3_8: U3.8 U6.40
NetU4_8: U4.8 U6.39
PORTA_N: J5.1 T1.6
PORTA_P: J5.2 T1.4
PORTB_N: J4.1 T1.3
PORTB_P: J4.2 T1.1
S1: R4_BC1.2 U6.37 | length 289.8
  Top Layer w10: R4_BC1.2@1686.02,134.84 1853.35,134.84 1939.96,221.46
S2: R4_BC2.2 U6.35 | length 289.8
  Top Layer w10: R4_BC2.2@1686.02,410.43 1853.35,410.43 1939.96,497.05
S3: R4_BC3.2 U6.33 | length 289.8
  Top Layer w10: R4_BC3.2@1686.02,686.02 1853.35,686.02 1939.96,772.64
S4: R4_BC4.2 U6.31 | length 289.8
  Top Layer w10: R4_BC4.2@1686.02,961.61 1853.35,961.61 1939.96,1048.23
S5: R4_BC5.2 U6.29 | length 289.8
  Top Layer w10: R4_BC5.2@1686.02,1237.2 1853.35,1237.2 1939.96,1323.82
S6: R4_BC6.2 U6.25 | length 289.8
  Top Layer w10: R4_BC6.2@1686.02,1512.8 1853.35,1512.8 1939.96,1599.41
S7: R4_BC7.2 U6.23 | length 289.8
  Top Layer w10: R4_BC7.2@1686.02,1788.39 1853.35,1788.39 1939.96,1875
S8: R4_BC8.2 U6.21 | length 289.8
  Top Layer w10: R4_BC8.2@1686.02,2063.98 1853.35,2063.98 1939.96,2150.59
S9: R4_BC9.2 U6.19 | length 289.8
  Top Layer w10: R4_BC9.2@1686.02,2339.57 1853.35,2339.57 1939.96,2426.18
S10: R4_BC10.2 U6.17 | length 289.8
  Top Layer w10: R4_BC10.2@1686.02,2615.16 1853.35,2615.16 1939.96,2701.77
S11: R4_BC11.2 U6.13 | length 289.8
  Top Layer w10: R4_BC11.2@1686.02,2890.75 1853.35,2890.75 1939.96,2977.36
S12: R4_BC12.2 U6.11 | length 289.8
  Top Layer w10: R4_BC12.2@1686.02,3166.34 1853.35,3166.34 1939.96,3252.95
S13: R4_BC13.2 U6.9 | length 289.8
  Top Layer w10: R4_BC13.2@1686.02,3441.93 1853.35,3441.93 1939.96,3528.54
S14: R4_BC14.2 U6.7 | length 289.8
  Top Layer w10: R4_BC14.2@1686.02,3717.52 1853.35,3717.52 1939.96,3804.13
SCL: R1.1 U1.1 U2.1 U3.1 U4.1 U6.43 | length 2005.7
  Top Layer w10: v1(7375,6101.38) 7394.69,6081.69 7424.44,6081.69 7424.44,6081.92 U2.1@7426.18,6083.66 ; v1(7375,6617.13) 7394.69,6597.44 7424.44,6597.44 7424.44,6597.66 U3.1@7426.18,6599.41 ; v1(7375,7132.87) 7394.69,7113.19 7424.44,7113.19 7424.44,7113.41 U4.1@7426.18,7115.16 ; v1(7390.75,5562.99) 7394.43,5562.99 7404.29,5553.13 7424.44,5553.13 7427.93,5549.64 U1.1@7427.93,5536.42
  Bottom Layer w10: v1(7375,6101.38) 7417.32,6143.7 ; v1(7375,7132.87) 7375,7130.39 7392.72,7112.67 7392.72,6899.61 7354.33,6861.22 7354.33,6637.8 v1(7375,6617.13) 7402.56,6589.57 7411.46,6589.57 7417.32,6583.71 7417.32,6143.7 ; R1.1@7376.97,5630.91 7376.97,5580.46 7390.75,5566.68 v1(7390.75,5562.99) 7417.32,5589.57 7417.32,6143.7
SDA: R2.1 U1.3 U2.3 U3.3 U4.3 U6.42 | length 2433
  Top Layer w10: v1(7358.27,7085.63) 7360.72,7083.17 7385.08,7083.17 7395.42,7072.83 7471.5,7072.83 7477.36,7078.69 U4.3@7477.36,7115.16 ; v1(7372.05,6557.09) 7375.73,6557.09 7382.62,6550.2 7471.5,6550.2 7477.36,6556.05 U3.3@7477.36,6599.41 ; v1(7379.92,6030.51) 7458.71,6030.51 7477.36,6049.16 U2.3@7477.36,6083.66 ; v1(7385.03,5494.89) 7464.38,5494.89 7478.35,5508.86 7478.35,5518.98 7478.09,5519.24 7478.09,5548.2 U1.3@7478.35,5548.46
  Bottom Layer w10: R2.1@7287.4,5493.11 7289.18,5494.89 7335.58,5494.89 ; v1(7358.27,7085.63) 7358.27,7084.65 7329.72,7056.1 7329.72,6599.41 ; v1(7372.05,6557.09) 7329.72,6599.41 ; v1(7379.92,6030.51) 7379.92,6033.46 7329.72,6083.66 ; v1(7385.03,5494.89) 7335.58,5494.89 ; 7329.72,6083.66 7329.72,5500.75 7335.58,5494.89 ; 7329.72,6083.66 7329.72,6599.41
Top14: F1_BC14.2 Q1_BC14.2 R3_BC14.1 | length 619.8
  Top Layer w10: 1100.39,3837.6 1434.06,3837.6 ; Q1_BC14.2@1477.36,3792.32 1477.36,3794.29 1434.06,3837.6 ; R3_BC14.1@1626.97,3787.4 1618.49,3795.88 1618.49,3811.63 1592.52,3837.6 1434.06,3837.6
USER_LED: R14.1 U6.46
VCC: R1.2 R2.2 | length 84.4
  Bottom Layer w10: v1(7181.1,5491.14) 7226.38,5491.14 R2.2@7228.35,5493.11 ; R1.2@7376.97,5689.96 7383.86,5696.85 v1(7383.86,5723.43)
Vin: F2.2 R9.1 R10.2
VREF1: C9.2 C10.2 U6.51 | length 243.7
  Top Layer w10: U6.51@2866.14,2300.2 2866.22,2300.28 2891.81,2300.28 2921.34,2329.8 2925.28,2329.8 C9.2@2934.06,2338.58 ; C9.2@2934.06,2342.52 C9.2@2934.06,2338.58 ; C10.2@3055.12,2346.46 3051.18,2346.46 3042.4,2337.68 3042.4,2335.71 3036.55,2329.85 3036.55,2316.88 3030.69,2311.02 2961.61,2311.02 C9.2@2934.06,2338.58
VREF2: C11.2 C12.2 R21_AFE1.2 R21_AFE2.2 R21_AFE3.2 R21_AFE4.2 R21_AFE5.2 R21_AFE6.2 R21_AFE7.2 R21_AFE8.2 R21_AFE9.2 R21_AFE10.2 R21_AFE11.2 R21_AFE12.2 R21_AFE13.2 R21_AFE14.2 R21_AFE15.2 R21_AFE16.2 R21_AFE17.2 R21_AFE18.2 R21_AFE19.2 R21_AFE20.2 R21_AFE21.2 R21_AFE22.2 R21_AFE23.2 R21_AFE24.2 R21_AFE25.2 R21_AFE26.2 R21_AFE27.2 R21_AFE28.2 U6.50 | length 3008.6
  Top Layer w10: U6.50@2866.14,2280.51 2933.07,2280.51 2934.06,2279.53 C12.2@2934.06,2216.54 ; v1(6277.56,7346.46) 6281.25,7346.46 6291.1,7336.6 6319.9,7336.6 R21_AFE1.2@6323.82,7332.68 ; R21_AFE28.2@6382.38,5465.55 6391.16,5456.77 6401.5,5456.77 6418.31,5439.96 v1(6418.31,5342.52) ; v1(6421.75,7455.71) 6421.75,7358.27 6438.56,7341.46 6448.9,7341.46 R21_AFE2.2@6457.68,7332.68 ; R21_AFE27.2@6516.24,5465.55 6525.02,5456.77 6535.35,5456.77 6552.17,5439.96 v1(6552.17,5342.52) ; v1(6555.61,7455.71) 6555.61,7358.27 6572.42,7341.46 6582.76,7341.46 R21_AFE3.2@6591.54,7332.68 ; R21_AFE26.2@6650.1,5465.55 6658.88,5456.77 6669.21,5456.77 6686.02,5439.96 v1(6686.02,5342.52) ; v1(6689.47,7455.71) 6689.47,7358.27 6706.28,7341.46 6716.61,7341.46 R21_AFE4.2@6725.39,7332.68 ; R21_AFE25.2@6783.96,5465.55 6792.74,5456.77 6803.07,5456.77 6819.88,5439.96 v1(6819.88,5342.52) ; v1(6902.56,5760.09) 6902.56,5756.41 6908.54,5750.42 6908.54,5739.09 6912.4,5735.24 R21_AFE23.2@6912.4,5726.38 ; v1(6902.56,5924.46) 6902.56,5920.78 6908.54,5914.79 6908.54,5903.46 6912.4,5899.61 R21_AFE21.2@6912.4,5890.75 ; v1(6902.56,6088.83) 6902.56,6085.15 6908.54,6079.16 6908.54,6067.83 6912.4,6063.98 R21_AFE19.2@6912.4,6055.12 ; v1(6902.56,6253.2) 6902.56,6249.52 6908.54,6243.53 6908.54,6232.2 6912.4,6228.35 R21_AFE17.2@6912.4,6219.49 ; v1(6902.56,6417.57) 6902.56,6413.89 6908.54,6407.9 6908.54,6396.57 6912.4,6392.72 R21_AFE15.2@6912.4,6383.86 ; v1(6902.56,6581.94) 6902.56,6578.26 6908.54,6572.27 6908.54,6560.94 6912.4,6557.09 R21_AFE13.2@6912.4,6548.23 ; v1(6902.56,6746.31) 6902.56,6742.63 6908.54,6736.64 6908.54,6725.31 6912.4,6721.46 R21_AFE11.2@6912.4,6712.6 ; v1(6902.56,6910.68) 6902.56,6907 6908.54,6901.01 6908.54,6889.69 6912.4,6885.83 R21_AFE9.2@6912.4,6876.97 ; v1(6902.56,7075.05) 6902.56,7071.37 6908.54,7065.38 6908.54,7054.06 6912.4,7050.2 R21_AFE7.2@6912.4,7041.34 ; v1(6902.56,7239.42) 6902.56,7235.74 6908.54,7229.75 6908.54,7218.43 6912.4,7214.57 R21_AFE5.2@6912.4,7205.71 ; R21_AFE24.2@7119.09,5644.19 7127.87,5652.97 7127.87,5663.31 7144.69,5680.12 v1(7242.13,5680.12) ; R21_AFE22.2@7119.09,5808.56 7127.87,5817.34 7127.87,5827.68 7144.69,5844.49 v1(7242.13,5844.49) ; R21_AFE20.2@7119.09,5972.93 7127.87,5981.71 7127.87,5992.05 7144.69,6008.86 v1(7242.13,6008.86) ; R21_AFE18.2@7119.09,6137.3 7127.87,6146.08 7127.87,6156.42 7144.69,6173.23 v1(7242.13,6173.23) ; R21_AFE16.2@7119.09,6301.67 7127.87,6310.45 7127.87,6320.79 7144.69,6337.6 v1(7242.13,6337.6) ; R21_AFE14.2@7119.09,6466.04 7127.87,6474.82 7127.87,6485.16 7144.69,6501.97 v1(7242.13,6501.97) ; R21_AFE12.2@7119.09,6630.41 7127.87,6639.19 7127.87,6649.53 7144.69,6666.34 v1(7242.13,6666.34) ; R21_AFE10.2@7119.09,6794.78 7127.87,6803.56 7127.87,6813.9 7144.69,6830.71 v1(7242.13,6830.71) ; R21_AFE8.2@7119.09,6959.15 7127.87,6967.93 7127.87,6978.27 7144.69,6995.08 v1(7242.13,6995.08) ; R21_AFE6.2@7119.09,7123.52 7127.87,7132.3 7127.87,7142.64 7144.69,7159.45 v1(7242.13,7159.45)
VTap1: F1_BC1.1 J2.14 | length 857.7
  Top Layer w23.62: J2.14@261.81,1866.14 262.01,1865.94 304.33,1865.94 375.91,1794.36 375.91,1354.2 557.09,1173.03 F1_BC1.1@557.09,1155.51
VTap2: F1_BC2.1 J2.13 | length 747.1
  Top Layer w23.62: J2.13@261.81,1905.51 316.93,1905.51 424.21,1798.23 424.21,1463.39 557.09,1330.51 F1_BC2.1@557.09,1312.99
VTap3: F1_BC3.1 J2.12 | length 648
  Top Layer w23.62: J2.12@261.81,1944.88 262.01,1944.68 349.61,1944.68 465.55,1828.74 465.55,1579.53 557.09,1487.99 F1_BC3.1@557.09,1470.47
VTap4: F1_BC4.1 J2.11 | length 544.9
  Top Layer w23.62: J2.11@261.81,1984.25 262.01,1984.06 375.2,1984.06 494.09,1865.16 494.09,1708.46 557.09,1645.47 F1_BC4.1@557.09,1627.95
VTap5: F1_BC5.1 J2.10 | length 440.1
  Top Layer w23.62: J2.10@261.81,2023.62 394.69,2023.62 518.83,1899.47 518.83,1896.4 528.1,1887.14 531.17,1887.14 557.09,1861.22 F1_BC5.1@557.09,1785.43
VTap6: F1_BC6.1 J2.9 | length 355.3
  Top Layer w23.62: J2.9@261.81,2062.99 454.53,2062.99 557.09,1960.43 F1_BC6.1@557.09,1942.91
VTap7: F1_BC7.1 J2.8 | length 296.1
  Top Layer w23.62: J2.8@261.81,2102.36 555.12,2102.36 F1_BC7.1@557.09,2100.39
VTap8: F1_BC8.1 J2.7 | length 353.6
  Top Layer w23.62: J2.7@261.81,2141.73 458.46,2141.73 557.09,2240.35 F1_BC8.1@557.09,2257.87
VTap9: F1_BC9.1 J2.6 | length 430.9
  Top Layer w23.62: J2.6@261.81,2181.1 388.78,2181.1 546.46,2338.78 546.46,2404.72 F1_BC9.1@557.09,2415.35
VTap10: F1_BC10.1 J2.5 | length 534.6
  Top Layer w23.62: J2.5@261.81,2220.47 262.01,2220.67 364.37,2220.67 498.03,2354.33 498.03,2454.07 555.24,2511.28 555.24,2570.98 F1_BC10.1@557.09,2572.83
VTap11: F1_BC11.1 J2.4 | length 647.6
  Top Layer w23.62: J2.4@261.81,2259.84 262.01,2260.04 355.51,2260.04 461.61,2366.14 461.61,2617.32 557.09,2712.8 F1_BC11.1@557.09,2730.31
VTap12: F1_BC12.1 J2.3 | length 758.7
  Top Layer w23.62: J2.3@261.81,2299.21 262.01,2299.41 343.7,2299.41 416.34,2372.05 416.34,2729.53 557.09,2870.28 F1_BC12.1@557.09,2887.8
VTap13: F1_BC13.1 J2.2 | length 861.9
  Top Layer w23.62: J2.2@261.81,2338.58 317.91,2338.58 343.5,2364.17 343.5,2814.17 557.09,3027.76 F1_BC13.1@557.09,3045.28
VTap14: F1_BC14.1 F2.1 J2.1 | length 1104.6
  Top Layer w23.62: J2.1@261.81,2377.95 261.81,2889.96 557.09,3185.24 F1_BC14.1@557.09,3202.76 F2.1@557.09,3360.24
VTap-1: F3.1 J2.15 | length 951
  Top Layer w23.62: J2.15@261.81,1826.77 261.81,1310.83 557.09,1015.55 F3.1@557.09,998.03
WDT: R11.2 U6.56 | length 316.6
  Top Layer w10: v1(2822.83,2393.7) 2827.76,2398.62 U6.56@2866.14,2398.62 ; v1(3039.37,2421.26) R11.2@3082.68,2421.26
  Bottom Layer w10: v1(2822.83,2393.7) 3011.81,2393.7 v1(3039.37,2421.26)
pads on no net: J1.S1 J1.S2 J2.S J4.P1 J4.P2 J5.P1 J5.P2 T1. T1.2 T1.5 U6.2 U6.3 U6.5 U6.14 U6.15 U6.26 U6.27 U6.45 U6.53 U6.54

## Polygon pours and split planes (outlines as drawn)
+5 on Top Layer "NONET_L-01_P-001" (solid, pour order 19): 2779.53,2224.41 2779.53,1976.38 2866.14,1976.38 2866.14,2224.41
Vin on Top Layer "NONET_L-01_P-001" (solid, pour order 18): 610.24,3474.41 442.91,3474.41 442.91,3612.2 846.46,3612.2 846.46,3513.78 728.35,3395.67 728.35,3287.4 610.24,3287.4
+5 on Top Layer "NONET_L-01_P-001" (solid, pour order 16): 816.93,4045.28 816.93,4291.34 1368.11,4291.34 1368.11,4045.28
NetC16_2 on Top Layer "NONET_L-01_P-001" (solid, pour order 15): 639.76,3683.07 639.76,4293.31 423.23,4293.31 423.23,3683.07
HC2_BC14 on Top Layer "NONET_L-01_P-001" (solid, pour order 14): 1361.22,3810.04 1442.91,3810.04 1442.91,3727.36 1526.57,3727.36 1526.57,3682.09 1361.22,3682.09
HC2_BC13 on Top Layer "NONET_L-01_P-001" (solid, pour order 13): 1361.22,3534.45 1442.91,3534.45 1442.91,3451.77 1526.57,3451.77 1526.57,3406.5 1361.22,3406.5
HC2_BC12 on Top Layer "NONET_L-01_P-001" (solid, pour order 12): 1361.22,3258.86 1442.91,3258.86 1442.91,3176.18 1526.57,3176.18 1526.57,3130.91 1361.22,3130.91
HC2_BC11 on Top Layer "NONET_L-01_P-001" (solid, pour order 11): 1361.22,2983.27 1442.91,2983.27 1442.91,2900.59 1526.57,2900.59 1526.57,2855.32 1361.22,2855.32
HC2_BC10 on Top Layer "NONET_L-01_P-001" (solid, pour order 10): 1361.22,2707.68 1442.91,2707.68 1442.91,2625 1526.57,2625 1526.57,2579.72 1361.22,2579.72
HC2_BC9 on Top Layer "NONET_L-01_P-001" (solid, pour order 9): 1361.22,2432.09 1442.91,2432.09 1442.91,2349.41 1526.57,2349.41 1526.57,2304.13 1361.22,2304.13
HC2_BC8 on Top Layer "NONET_L-01_P-001" (solid, pour order 8): 1361.22,2156.5 1442.91,2156.5 1442.91,2073.82 1526.57,2073.82 1526.57,2028.54 1361.22,2028.54
HC2_BC7 on Top Layer "NONET_L-01_P-001" (solid, pour order 6): 1361.22,1880.91 1442.91,1880.91 1442.91,1798.23 1526.57,1798.23 1526.57,1752.95 1361.22,1752.95
HC2_BC6 on Top Layer "NONET_L-01_P-001" (solid, pour order 5): 1361.22,1605.32 1442.91,1605.32 1442.91,1522.64 1526.57,1522.64 1526.57,1477.36 1361.22,1477.36
HC2_BC5 on Top Layer "NONET_L-01_P-001" (solid, pour order 4): 1361.22,1329.72 1442.91,1329.72 1442.91,1247.05 1526.57,1247.05 1526.57,1201.77 1361.22,1201.77
HC2_BC4 on Top Layer "NONET_L-01_P-001" (solid, pour order 3): 1361.22,1054.13 1442.91,1054.13 1442.91,971.46 1526.57,971.46 1526.57,926.18 1361.22,926.18
HC2_BC3 on Top Layer "NONET_L-01_P-001" (solid, pour order 2): 1361.22,778.54 1442.91,778.54 1442.91,695.87 1526.57,695.87 1526.57,650.59 1361.22,650.59
HC2_BC2 on Top Layer "NONET_L-01_P-001" (solid, pour order 1): 1361.22,502.95 1442.91,502.95 1442.91,420.28 1526.57,420.28 1526.57,375 1361.22,375
HC2_BC1 on Top Layer "NONET_L-01_P-001" (solid, pour order 0): 1361.22,227.36 1442.91,227.36 1442.91,144.69 1526.57,144.69 1526.57,99.41 1361.22,99.41

## Silkscreen, mask and mechanical layers (free items; w line width, h text height)
Top Overlay:
  text "A0: 0 / A1: 0" at 7630.91,7266.73 h39.37 r270
  text "A0: 1 / A1: 0" at 7630.91,6750.98 h39.37 r270
  text "A0: 0 / A1: 1" at 7630.03,6234.36 h39.37 r270
  text "A0: 1 / A1: 1" at 7630.91,5691.93 h39.37 r270
  text "5V" at 4681.1,471.35 h78.74